# Altium PCB RA-Manager_Relays.PcbDoc
Units mm, origin at the board's own origin, x right, y up, seen from the top; angles counter-clockwise.
Board outline 79.48 x 94.43 mm, 2 copper layers (Top Layer, Bottom Layer), stack 1.571 mm thick; 55 components, 43 nets, 180 pads, 15 vias.
Unrouted connection lines stored in the file: 91.
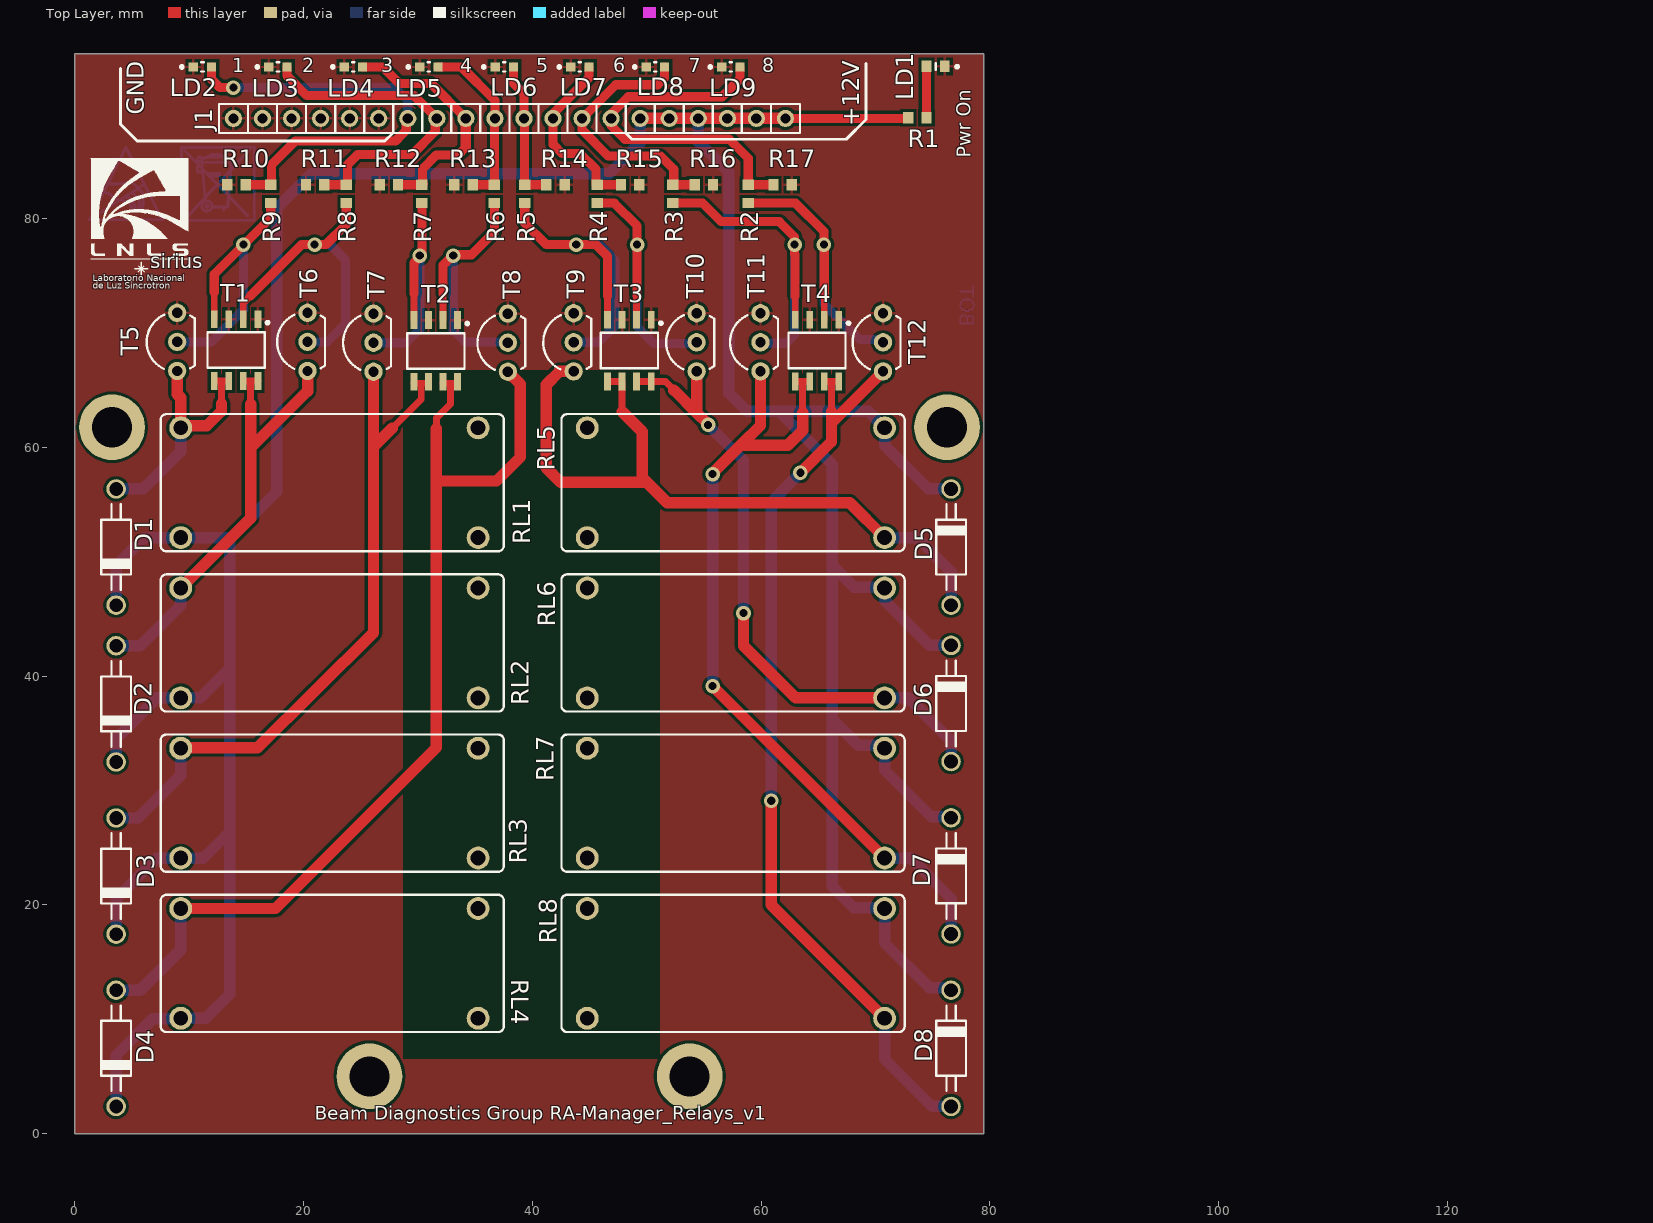
[diagram p0: Top Layer view]
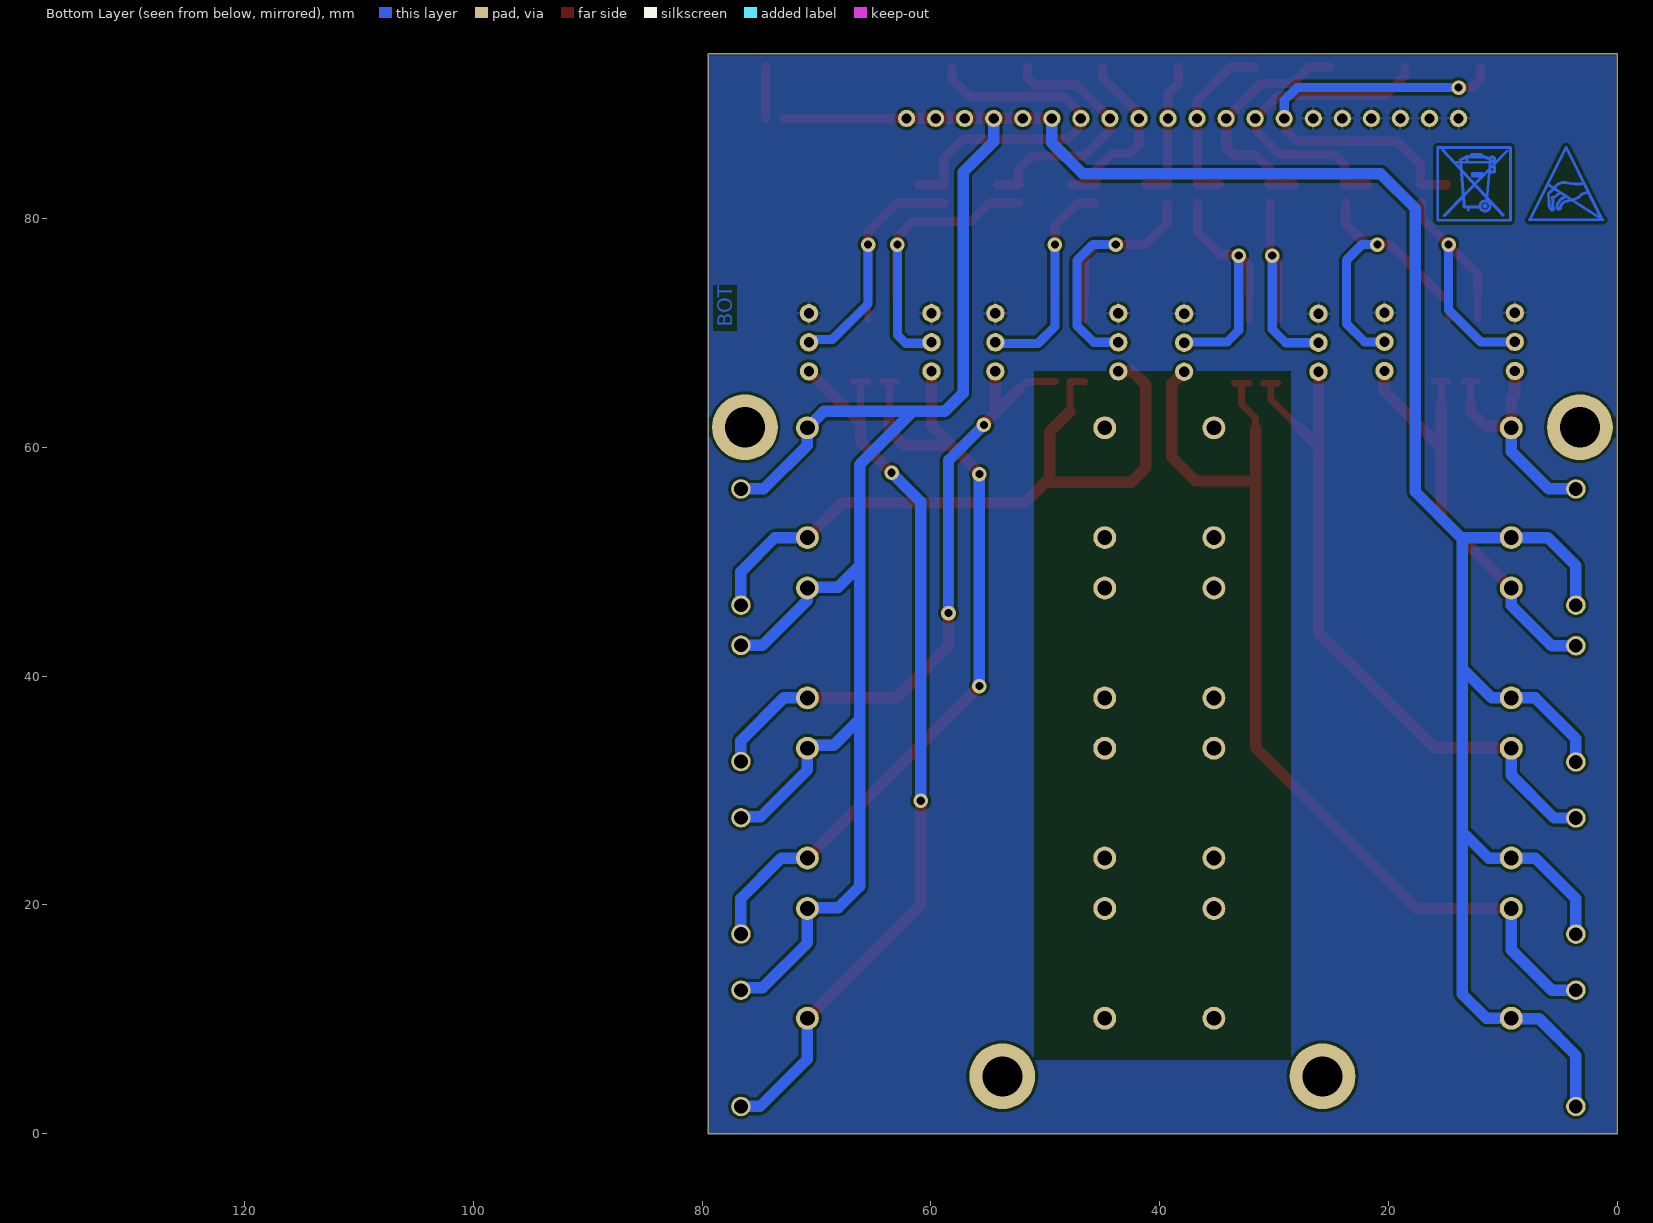
[diagram p1: Bottom Layer view, seen from below]
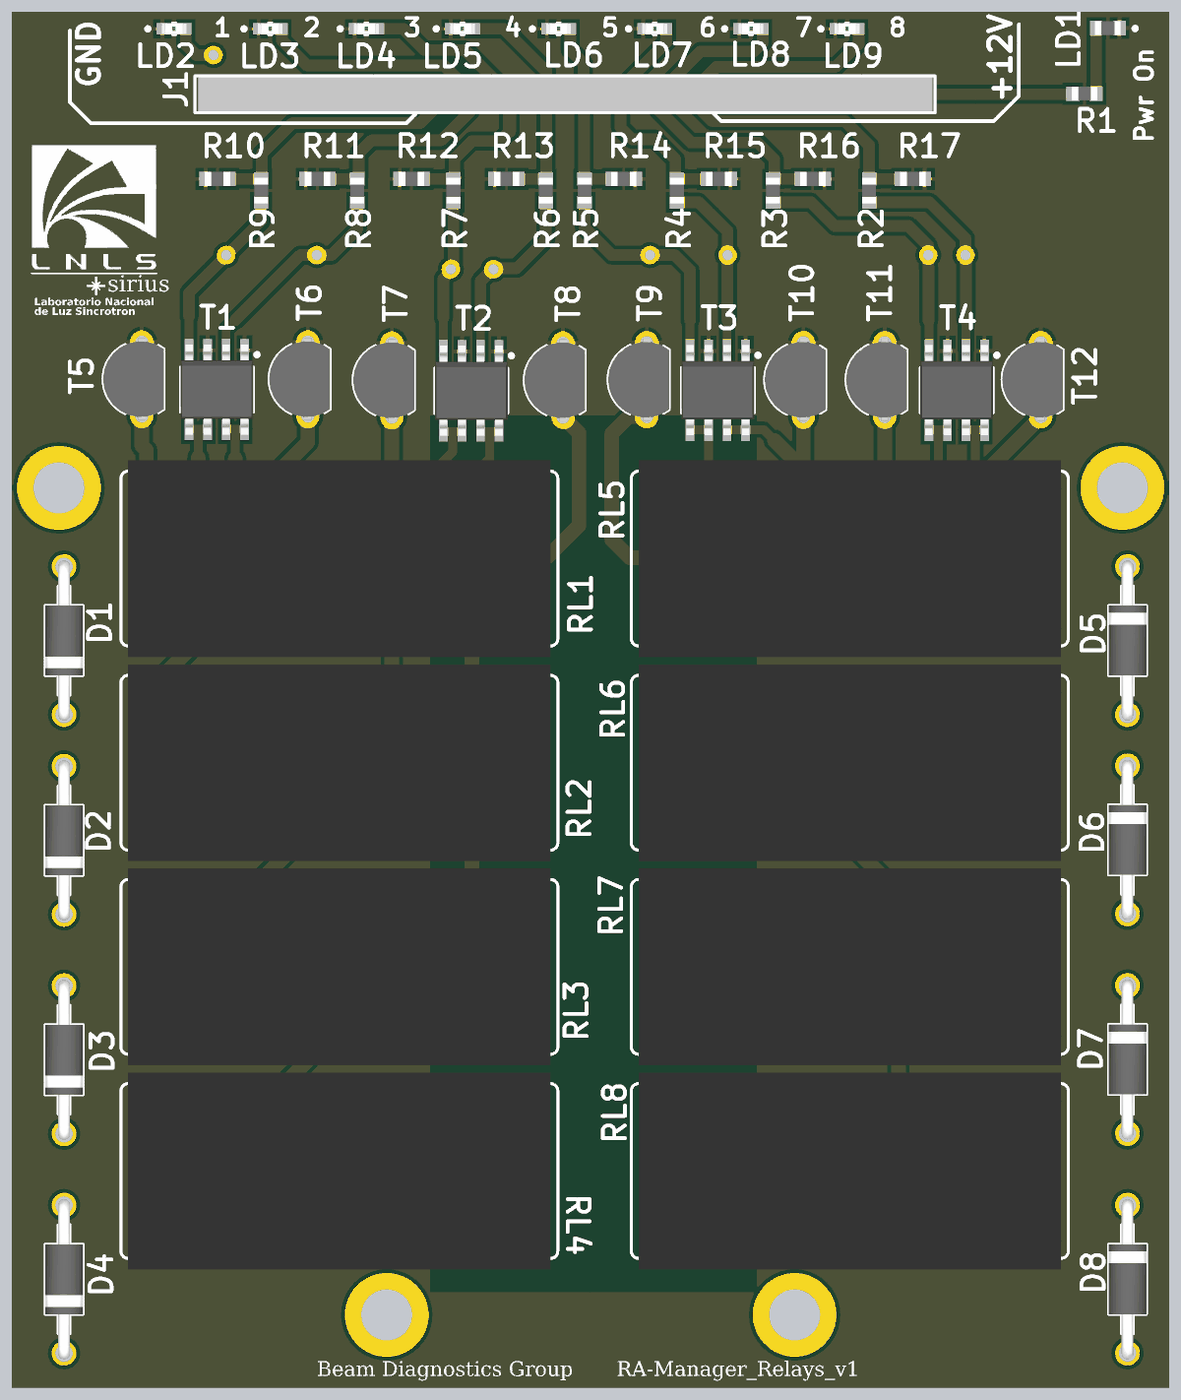
[diagram p2: 3D render of the assembled board from above, using the file's embedded part models]

## Layer stack, top to bottom
Top Solder: solder mask 0.0102, Solder Resist, Dk 3.5
Top Layer: signal copper 0.0356
Dielectric1: core 0.5, FR-4, Dk 4.8
Dielectric2: prepreg 0.5, FR-4, Dk 4.8
Dielectric3: core 0.5, FR-4, Dk 4.8
Bottom Layer: signal copper 0.0356
Bottom Solder: solder mask 0.0102, Solder Resist, Dk 3.5

## Board outline
0,94.425 0,0 79.475,0 79.475,94.425
cut-out: -3.75,23.75
cut-out: -3.75,23.75

## Design rules (kind name [scope] priority, off if disabled: settings)
Clearance Clearance_1 [All] p1: gap=0.254 ignorepadtopadclearanceinfootprint=TRUE
Height [All] p1: minheight=0 maxheight=28 prefheight=12.7
HoleSize [All] p1: absolutevalues=TRUE maxlimit=3.81 minlimit=0.025 maxpercent=80.000 minpercent=20.000
MinimumSolderMaskSliver [All] p1: minsoldermaskwidth=0
PlaneConnect [All] p1: planeconnectstyle=Direct reliefexpansion=0.508 reliefentries=4 reliefconductorwidth=0.254 reliefairgap=0.254
PolygonConnect [All] p1: connectstyle=Relief reliefconductorwidth=0.254 reliefentries=4 polygonreliefangle="90 Angle" airgapwidth=0.254
RoutingVias [All] p1: holewidth=0.711 width=1.27 viastyle="Through Hole" minholewidth=0.711 minwidth=1.27 maxholewidth=0.711 maxwidth=1.27
SilkToSilkClearance [All] p1: silktosilkclearance=0
SilkToSolderMaskClearance [IsPad] p1: minsilkscreentomaskgap=0.1 clearancetoexposedcopper=TRUE
SolderMaskExpansion [All] p1: expansion=0.03
UnRoutedNet [All] p1: checkbadconnections=TRUE
Width [All] p1: maxlimit=1.27 minlimit=0.203 preferedwidth=0.381
23 further rules are at their usual default settings.

## Components (designator, comment, footprint, x,y, rotation, side; value= is the part's Value field where it differs from the comment)
D1 "1N4007" DO-41 3.6,51.275 r90 top
D2 "1N4007" DO-41 3.6,37.567 r90 top
D3 "1N4007" DO-41 3.6,22.508 r90 top
D4 "1N4007" DO-41 3.6,7.45 r90 top
D5 "1N4007" DO-41 76.6,51.275 r270 top
D6 "1N4007" DO-41 76.6,37.6 r270 top
D7 "1N4007" DO-41 76.6,22.525 r270 top
D8 "1N4007" DO-41 76.6,7.45 r270 top
J1 "=Family" TYCO_2-87224-0 13.858,88.75 r0 top locked
LD1 "Green" LED_KINGBRIGHT_APA1606_0605 75.25,93.25 r180 top
LD2 "Orange" LED_OSRAM_LGL29K 11.15,93.25 r0 top
LD3 "Orange" LED_OSRAM_LGL29K 17.75,93.25 r0 top
LD4 "Orange" LED_OSRAM_LGL29K 24.35,93.25 r0 top
LD5 "Orange" LED_OSRAM_LGL29K 30.95,93.25 r0 top
LD6 "Orange" LED_OSRAM_LGL29K 37.55,93.25 r0 top
LD7 "Orange" LED_OSRAM_LGL29K 44.15,93.25 r0 top
LD8 "Orange" LED_OSRAM_LGL29K 50.75,93.25 r0 top
LD9 "Orange" LED_OSRAM_LGL29K 57.35,93.25 r0 top
R1 "360" RESC1608X55N 73.65,88.8 r180 top
R2 "1k" RESC1608X55N 58.868,82.15 r270 top
R3 "1k" RESC1608X55N 52.266,82.15 r270 top
R4 "1k" RESC1608X55N 45.664,82.15 r270 top
R5 "1k" RESC1608X55N 39.325,82.15 r270 top
R6 "1k" RESC1608X55N 36.668,82.15 r270 top
R7 "1k" RESC1608X55N 30.329,82.15 r270 top
R8 "1k" RESC1608X55N 23.727,82.15 r270 top
R9 "1k" RESC1608X55N 17.125,82.15 r270 top
R10 "4k7" RESC1608X55N 14.125,82.95 r180 top
R11 "4k7" RESC1608X55N 21,82.95 r180 top
R12 "4k7" RESC1608X55N 27.45,82.95 r180 top
R13 "4k7" RESC1608X55N 33.975,82.95 r180 top
R14 "4k7" RESC1608X55N 42.018,82.95 r0 top
R15 "4k7" RESC1608X55N 48.543,82.95 r0 top
R16 "4k7" RESC1608X55N 54.993,82.95 r0 top
R17 "4k7" RESC1608X55N 61.868,82.95 r0 top
RL1 "12VDC" REL_YRE_YR-PL2-12 7.5,50.901 r0 top locked
RL2 "12VDC" REL_YRE_YR-PL2-12 7.5,36.892 r0 top locked
RL3 "12VDC" REL_YRE_YR-PL2-12 7.5,22.884 r0 top locked
RL4 "12VDC" REL_YRE_YR-PL2-12 7.5,8.875 r0 top locked
RL5 "12VDC" REL_YRE_YR-PL2-12 72.537,62.901 r180 top locked
RL6 "12VDC" REL_YRE_YR-PL2-12 72.537,48.892 r180 top locked
RL7 "12VDC" REL_YRE_YR-PL2-12 72.537,34.884 r180 top locked
RL8 "12VDC" REL_YRE_YR-PL2-12 72.537,20.875 r180 top locked
T1 "IRF9910Pbf" SOIC127P600X175-8N 14.085,68.494 r270 top
T2 "IRF9910Pbf" SOIC127P600X175-8N 31.55,68.419 r270 top
T3 "IRF9910Pbf" SOIC127P600X175-8N 48.477,68.453 r270 top
T4 "IRF9910Pbf" SOIC127P600X175-8N 64.877,68.453 r270 top
T5 "BC337" TO-92AA-P254 8.935,69.215 r90 top
T6 "BC337" TO-92AA-P254 20.335,69.215 r90 top
T7 "BC337" TO-92AA-P254 26.1,69.14 r90 top
T8 "BC337" TO-92AA-P254 37.85,69.14 r90 top
T9 "BC337" TO-92AA-P254 43.602,69.175 r90 top
T10 "BC337" TO-92AA-P254 54.352,69.175 r90 top
T11 "BC337" TO-92AA-P254 59.935,69.175 r90 top
T12 "BC337" TO-92AA-P254 70.652,69.175 r90 top

## Footprints (in the part's own frame and the unit in brackets; to place one, negate y for a bottom-side part, rotate by r counter-clockwise, add the part's x,y. Pads: shape width x height; smd on the part's side, far side on the other; paste and mask are expansions set on the pad)
DO-41 [mm] "DO-41, Diode, Axial, Body 4.7 x 2.7 mm (LxDia. max), Pin spacing 10.16mm"
  round 1.7 hole 1.2: 1(-5.08,0) 2(5.08,0)
  silkscreen extent -3.74,-1.3 3.74,1.3, body extent -5.48,-1.3 5.48,1.3, height 2.6
LED_KINGBRIGHT_APA1606_0605 [mm] "SMD LED, 2-Leads, Body 1.75x0.95mm, 0605, IPC Medium Density"
  rect 0.85x1 smd: 1(-0.8,-0.05) 2(0.8,-0.05)
  silkscreen extent -2,-0.35 0,0.25, body extent -0.87,-0.52 0.88,0.43, height 0.64
LED_OSRAM_LGL29K [mm] "Green Chip LED, 2-Leads, Body 1.7x0.8mm, IPC Medium Density"
  rect 0.8x0.8 smd: 1(-0.8,0) 2(0.8,0)
  silkscreen extent -1.92,-0.4 0.1,0.4, body extent -0.85,-0.4 0.85,0.4, height 0.67
REL_YRE_YR-PL2-12 [mm]
  round 2 hole 1.3: 1(1.75,1.2) 2(1.75,10.8) 3(27.75,10.8) 4(27.75,1.2)
  silkscreen extent 0,0 30,12, body extent 0.5,-0.75 29.5,12.75, height 25.8
RESC1608X55N [mm] "Chip Resistor, EIA 0603, Metric 1608, Body 1.6x0.8mm, IPC Medium Density"
  rect 0.9x1 smd: 1(-0.8,0) 2(0.8,0)
  body extent -0.87,-0.47 0.88,0.48, height 0.55
SOIC127P600X175-8N [mm] "SOIC 8, Pitch 1.27mm - Body 4x5mm, IPC Medium Density"
  rect 1.55x0.6 smd: 1(-2.7,1.905) 2(-2.7,0.635) 3(-2.7,-0.635) 4(-2.7,-1.905) 5(2.7,-1.905) 6(2.7,-0.635) 7(2.7,0.635) 8(2.7,1.905)
  silkscreen extent -2.52,-2.5 1.55,2.88, body extent -3.1,-2.5 3.1,2.5, height 1.75
TO-92AA-P254 [mm] "TO-92 (TO226), Pitch 2.54mm, Flat Index, 3 In-Line, Bent Leads, Body Dia. 5.3mm"
  round 1.6 hole 0.9: 1(-2.54,0) 2(0,0) 3(2.54,0)
  silkscreen extent -2.36,-1.53 2.37,2.66, body extent -2.81,-1.53 2.81,2.64, height 9.33
TYCO_2-87224-0 [mm] "20 Positions, Pitch 2.54mm, Width 2.54mm, Heigh 13.5mm, SIP Straight Socket"
  round 1.5 hole 0.9: 1(0,0) 2(2.54,0) 3(5.08,0) 4(7.62,0) 5(10.16,0) 6(12.7,0) 7(15.24,0) 8(17.78,0) 9(20.32,0) 10(22.86,0) 11(25.4,0) 12(27.94,0) 13(30.48,0) 14(33.02,0) 15(35.56,0) 16(38.1,0) 17(40.64,0) 18(43.18,0) 19(45.72,0) 20(48.26,0)
  silkscreen extent -1.27,-1.27 49.53,1.27, body extent -1.05,-1.17 49.35,1.17, height 10.37

## Part data
D1 D2 D3 D4 D5 D6 D7 D8: "Diode", Case=DO-41, Manufacturer="FAIRCHILD SEMICONDUCTOR", Power=1A, Voltage=1000V, Author="CERN DEM JLC", Bonding=No, ComponentHeight=2.72mm, ComponentLink1Description="Package Drawing", ComponentLink1URL=\\cern.ch\dfs\Applications\Altium\Datasheets\1N4007_Package.pdf, Component Type=Standard, CreateDate=20/08/2008, Device=1N4007, HelpURL=\\cern.ch\dfs\Applications\Altium\Datasheets\1N4007.pdf, LatestRevisionDate=30/10/2013, Manufacturer Part Number=1N4007, Mounted=Yes, PackageDescription="DO-41, Diode, Axial, Body 4.7 x 2.7mm (LxDia. Max), Pin spacing 10.16mm", Part Description="Axial Lead Standard Recovery Rectifier", Part Number=1N4007, Pin Count=2, PressFit=No, Sense=No, SMD=No, Socket=No
J1: library part TYCO_2-87224-0, "Connector 20 Male", Manufacturer="TYCO ELECTRONICS", Manufacturer Part Number=2-87224-0, Author="LNLS DIG LOS", ComponentHeight=13.5mm, Component Type=Standard, CreateDate=16/11/2017, LatestRevisionDate=16/11/2017, Mounted=Yes, Part Description="20 Contacts, Connector header vertical", Part Number=TYCO_2-87224-0, Pin Count=20, PressFit=No, Sense=No, SMD=No, Socket=No, Status=None
LD1: library part APA1606ZGC, "LED Green 1C 2A", Case=0605, Manufacturer=KINGBRIGHT, Author="LNLS DIG LOS", Bonding=No, Color=Green, ComponentHeight=1.2mm, Component Type=Standard, CreateDate=31/08/2017, LatestRevisionDate=31/08/2017, Manufacturer Part Number=APA1606ZGC, Mounted=Yes, PackageDescription="SMD LED, 2-Leads, Body 1.75x0.95mm, 0605, IPC Medium Density", Part Description="SMD Led Right Angle", Part Number=APA1606ZGC, Pin Count=2, PressFit=No, Sense=No, SMD=Yes, Socket=No
LD2 LD3 LD4 LD5 LD6 LD7 LD8 LD9: library part "LO L29K-J2L1-24-Z", "LED Orange 1C 2A", Case=0603, Manufacturer=OSRAM, Author="LNLS DIG LOS", Bonding=No, Color=Orange, ComponentHeight=0.67mm, Component Type=Standard, CreateDate=31/08/2017, LatestRevisionDate=31/08/2017, Manufacturer Part Number="LO L29K-J2L1-24-Z", Mounted=Yes, PackageDescription="Green Chip LED, 2-Leads, Body 1.7x0.8mm, IPC Medium Density", Part Description="Surface Mount LED (0603 Case)", Part Number="LO L29K-J2L1-24-Z", Pin Count=2, PressFit=No, Sense=No, SMD=Yes, Socket=No
R1: library part R0603_360R_1%_0.1W_100PPM, "Resistor - 1%", Case=0603, Manufacturer=GENERIC, Manufacturer1 ComponentHeight=0.55mm, Manufacturer1 Example="NIC COMPONENT", Manufacturer1 Part Number=NRC06F3600TRF, Power=0.1W, Tolerance=±1%, Author="CERN DEM JLC", Component Type=Standard, CreateDate=03/12/2007, HelpURL=\\cern.ch\dfs\Applications\Altium\Datasheets\R0603_NIC_NRC.pdf, LatestRevisionDate=13/03/2008, Manufacturer Part Number=R0603_360R_1%_0.1W_100PPM, Mounted=Yes, Part Description="General Purpose Thick Film Chip Resistor", Part Number=R0603_360R_1%_0.1W_100PPM, Pin Count=2, Sense=No, SMD=Yes, Socket=No, Status=Preferred, TC=±100ppm/°C
R2 R3 R4 R5 R6 R7 R8 R9: library part R0603_1K_1%_0.1W_100PPM, "Resistor - 1%", Case=0603, Manufacturer=GENERIC, Manufacturer1 ComponentHeight=0.55mm, Manufacturer1 Example="NIC COMPONENT", Manufacturer1 Part Number=NRC06F1001TRF, Power=0.1W, Tolerance=±1%, Author="CERN DEM JLC", Component Type=Standard, CreateDate=03/12/2007, HelpURL=\\cern.ch\dfs\Applications\Altium\Datasheets\R0603_NIC_NRC.pdf, LatestRevisionDate=13/03/2008, Manufacturer Part Number=R0603_1K_1%_0.1W_100PPM, Mounted=Yes, Part Description="General Purpose Thick Film Chip Resistor", Part Number=R0603_1K_1%_0.1W_100PPM, Pin Count=2, Sense=No, SMD=Yes, Socket=No, Status=Preferred, TC=±100ppm/°C
R10 R11 R12 R13 R14 R15 R16 R17: library part R0603_4K7_1%_0.1W_100PPM, "Resistor - 1%", Case=0603, Manufacturer=GENERIC, Manufacturer1 ComponentHeight=0.55mm, Manufacturer1 Example="NIC COMPONENT", Manufacturer1 Part Number=NRC06F4701TRF, Power=0.1W, Tolerance=±1%, Author="CERN DEM JLC", Component Type=Standard, CreateDate=03/12/2007, HelpURL=\\cern.ch\dfs\Applications\Altium\Datasheets\R0603_NIC_NRC.pdf, LatestRevisionDate=13/03/2008, Manufacturer Part Number=R0603_4K7_1%_0.1W_100PPM, Mounted=Yes, Part Description="General Purpose Thick Film Chip Resistor", Part Number=R0603_4K7_1%_0.1W_100PPM, Pin Count=2, Sense=No, SMD=Yes, Socket=No, Status=Preferred, TC=±100ppm/°C
RL1 RL2 RL3 RL4 RL5 RL6 RL7 RL8: library part REL_YRE_YR-PL2-12, Manufacturer=YRE, Manufacturer Part Number=YR-PL2-12, Author="LNLS DIG CAI", ComponentHeight=28mm, ComponentLink1URL=https://proesi.com.br/rele-para-refrigerac-o-yr-pl2-12-12v-16a-250vac.html, Component Type=Standard, CreateDate=06/02/2020, LatestRevisionDate=06/02/2020, Mounted=Yes, PackageDescription="4 Leads, Row Spacing  9,6 mm; Body 30mm x 12mm  YR Serie", Part Description="16A SPDT Power PCB Relay YR Series", Part Number=REL_YRE_YR-PL2-12, Pin Count=4, PressFit=No, Sense=No, SMD=No, Socket=No, Status=None
T1 T2 T3 T4: "Dual SO-8 MOSFET For POL Cconverter", Case=DO8, Manufacturer="INTERNATIONAL RECTIFIER", Author="CERN DEM JLC", Bonding=No, ComponentHeight=1.75mm, Component Type=Standard, CreateDate=30/08/2010, Device=IRF9910Pbf, HelpURL=\\cern.ch\dfs\Applications\Altium\Datasheets\IRF9910Pbf.pdf, LatestRevisionDate=30/08/2010, Manufacturer Part Number=IRF9910Pbf, Mounted=Yes, PackageDescription="SOIC 8, Pitch 1.27mm - Body 4x5mm, IPC Medium Density", Part Description="20V 10A(Q1) 20V 12A (Q2) Dual SO-8 MOSFET For POL Cconverter", Part Number=IRF9910Pbf, Pin Count=8, PressFit=No, Sense=No, SMD=Yes, Socket=No
T5 T6 T7 T8 T9 T10 T11 T12: "NPN Transistor", Case=TO-92, Manufacturer="FAIRCHILD SEMICONDUCTOR", Author="CERN DEM JLC", Bonding=No, ComponentHeight=7.7mm, Component Type=Standard, CreateDate=18/11/2008, Device=BC337, HelpURL=\\cern.ch\dfs\Applications\Altium\Datasheets\BC337.pdf, LatestRevisionDate=27/08/2014, Manufacturer Part Number=BC337, Mounted=Yes, PackageDescription="TO-92 (TO226), Pitch 2.54mm, Flat Index, 3 In-Line, Bent Leads, Body Dia. 5.3mm", Part Description="45V 800mA NPN Small Signal Transistor", Part Number=BC337, Pin Count=3, PressFit=No, Sense=No, SMD=No, Socket=No, Status=Obsolete

## Free pads (board coordinates)
  round 5.75 hole 3.5: 47(3.25,61.75) 47(25.75,5) 47(53.75,5) 47(76.25,61.75)

## Via types
v1: diameter 1.27, hole 0.711, Top Layer to Bottom Layer, 15 vias

## Nets (pads, with @x,y where several pads share a name; then routed paths per layer and width w, separated by ;. In a path a pad name is that pad's centre, name@x,y a point inside that pad or via, vN(x,y) a via of type N, cw(c..) or ccw(c..) an arc to the next point about the centre after c; other vN are vias at no path point)
12Vin: D1.1 D2.1 D3.1 D4.1 D5.1 D6.1 D7.1 D8.1 J1.15 J1.16 J1.17 J1.18 J1.19 J1.20 R1.2 RL1.1 RL2.1 RL3.1 RL4.1 RL5.1 RL6.1 RL7.1 RL8.1 | length 327.5
  Top Layer w0.8: J1.20@62.127,88.756 R1.2@72.85,88.756
  Top Layer w1: J1.15@49.427,88.756 J1.20@62.127,88.756
  Bottom Layer w1: D4.1 3.6,6.825 6.813,10.038 9.213,10.038 RL4.1 11.425,10.075 13.55,12.2 13.55,25.975 13.55,40.675 ; D3.1 3.6,20.525 7.159,24.084 RL3.1 11.234,24.084 13.125,25.975 ; D2.1 3.6,34.525 7.167,38.092 RL2.1 10.967,38.092 13.55,40.675 ; D1.1 3.6,49.65 6.051,52.101 RL1.1 13.575,52.101 ; J1.15 49.418,86.618 46.7,83.9 20.65,83.9 17.625,80.875 17.625,56.1 13.55,52.025 13.55,40.675 ; J1.17 54.498,86.722 57.175,84.046 57.175,64.725 58.77,63.13 61.57,63.13 ; 66.225,36.221 68.491,33.955 70.516,33.955 RL7.1 70.787,31.784 74.886,27.685 76.52,27.685 D7.1 ; 66.225,49.375 66.225,21.6 68.07,19.755 70.707,19.755 RL8.1 70.787,16.663 74.706,12.744 76.386,12.744 D8.1 ; D6.1 74.741,42.68 70.787,46.634 RL6.1 70.707,47.772 68.098,47.772 66.225,49.646 66.225,58.475 61.57,63.13 ; D5.1 74.616,56.355 70.787,60.184 RL5.1 69.358,63.13 61.57,63.13
"Controller Out 1": R9.2 T1.4 T5.2 | length 24.9
  Top Layer w0.6: T1.4 12.18,73.549
  Top Layer w0.8: 12.18,73.549 12.18,75.13 17.125,80.075 R9.2
  Bottom Layer w0.8: T5.2 11.94,69.215 14.725,72 v1(14.725,77.725)
"Controller Out 2": R8.2 T1.2 T6.2 | length 27.9
  Top Layer w0.6: T1.2 14.72,72.62 15.35,73.25
  Top Layer w0.8: 15.35,73.25 19.825,77.725 21.95,77.725 23.725,79.5 23.725,81.348 R8.2
  Bottom Layer w0.8: T6.2 22.065,69.215 23.65,70.8 23.65,76.375 22.3,77.725 v1(20.95,77.725)
"Controller Out 3": R7.2 T2.4 T7.2 | length 21.5
  Top Layer w0.6: T2.4 29.645,73.425
  Top Layer w0.8: 29.645,73.425 29.645,76.122 30.329,76.805 R7.2
  Bottom Layer w0.8: T7.2 28.965,69.14 30.15,70.325 v1(30.15,76.753)
"Controller Out 4": R6.2 T2.2 T8.2 | length 24.7
  Top Layer w0.6: T2.2 32.185,73.45
  Top Layer w0.8: 32.185,73.45 32.185,75.938 33.072,76.825 34.675,76.825 36.668,78.818 R6.2
  Bottom Layer w0.8: v1(33.08,76.753) 33.08,70.22 34.085,69.215 T8.2@37.775,69.215
"Controller Out 5": R5.2 T3.4 T9.2 | length 29.6
  Top Layer w0.6: T3.4 46.572,73.25
  Top Layer w0.8: R5.2 39.325,79.6 41.2,77.725 v1(43.825,77.725) 45.525,77.725 46.572,76.678 46.572,73.25
  Bottom Layer w0.8: T9.2 45.75,69.175 47.225,70.65 47.225,76.325 45.825,77.725 v1(43.825,77.725)
"Controller Out 6": R4.2 T3.2 T10.2 | length 25.3
  Top Layer w0.6: T3.2 49.112,73.25
  Top Layer w0.8: R4.2 47.155,81.35 49.15,79.355 49.15,77.55 49.131,77.531 49.131,73.25
  Bottom Layer w0.8: v1@49.15,77.55 49.15,70.55 50.625,69.075 54.002,69.075 T10.2@54.227,69.3
  other v1: 49.15,77.725
"Controller Out 7": R3.2 T4.4 T11.2 | length 30.4
  Top Layer w0.6: 62.948,73.223 62.972,73.2 T4.4
  Top Layer w0.8: R3.2 54.875,81.35 56.5,79.725 61.575,79.725 62.925,78.375 v1(62.925,77.725) 62.925,76.875 62.948,76.852 62.948,73.223
  Bottom Layer w0.8: T11.2 60.01,69.1 62.2,69.1 62.925,69.825 v1(62.925,77.725)
"Controller Out 8": R2.2 T4.2 T12.2 | length 27.5
  Top Layer w0.6: T4.2 65.512,73.225
  Top Layer w0.8: R2.2 63,81.35 65.475,78.875 v1(65.475,77.725) 65.512,77.688 65.512,73.225
  Bottom Layer w0.8: v1(65.475,77.725) 65.475,75.978 65.475,72.55 68.608,69.417 70.894,69.417 T12.2@71.095,69.215
GND: J1.1 J1.2 J1.3 J1.4 J1.5 J1.6 LD1.1 LD2.1 LD3.1 LD4.1 LD5.1 LD6.1 LD7.1 LD8.1 LD9.1 R10.2 R11.2 R12.2 R13.2 R14.2 R15.2 R16.2 R17.2 T1.1 T1.3 T2.1 T2.3 T3.1 T3.3 T4.1 T4.3 T5.3 T6.3 T7.3 T8.3 T9.3 T10.3 T11.3 T12.3
NetLD1_2: LD1.2 R1.1 | length 4.5
  Top Layer w0.8: R1.1 LD1.2
NetRL1_3: RL1.3
NetRL1_4: RL1.4
NetRL2_3: RL2.3
NetRL2_4: RL2.4
NetRL3_3: RL3.3
NetRL3_4: RL3.4
NetRL4_3: RL4.3
NetRL4_4: RL4.4
NetRL5_3: RL5.3
NetRL5_4: RL5.4
NetRL6_3: RL6.3
NetRL6_4: RL6.4
NetRL7_3: RL7.3
NetRL7_4: RL7.4
NetRL8_3: RL8.3
NetRL8_4: RL8.4
PD1: J1.7 LD2.2 R9.1 R10.1 | length 38.9
  Top Layer w0.8: LD2.2 11.95,92.175 12.675,91.45 v1(13.858,91.45) ; R10.1 R9.1 17.15,82.95 17.175,82.975 17.175,84.675 19.275,86.775 28.025,86.775 28.6,87.35 28.964,87.714 28.964,88.616 J1.7 J1.7@28.909,88.75
  Bottom Layer w0.8: v1(13.858,91.45) 27.975,91.45 29.098,90.327 J1.7
PD2: J1.8 LD3.2 R8.1 R11.1 | length 29.2
  Top Layer w0.8: LD3.2 18.55,92.475 20.279,90.746 29.642,90.746 J1.8 31.504,88.616 31.504,87.629 29.475,85.6 24.725,85.6 23.827,84.702 23.827,82.975 23.802,82.95 R8.1 R11.1
PD3: J1.9 LD4.2 R7.1 R12.1 | length 21.5
  Top Layer w0.8: LD4.2 26.9,93.25 28.35,91.8 31.128,91.8 J1.9 ; R12.1 R7.1 ; R7.1@30.4,83.021 30.4,84.35 31.6,85.55 33.5,85.55 34.178,86.228
  Top Layer w0.9: R7.1 30.354,82.95 30.379,82.975 30.379,83 R7.1@30.4,83.021 ; 34.178,86.228 J1.9
PD4: J1.10 LD5.2 R6.1 R13.1 | length 15.5
  Top Layer w0.8: LD5.2 33.8,93.25 36.718,90.332 J1.10 36.693,88.725 36.693,82.975 R6.1 R13.1
PD5: J1.11 LD6.2 R5.1 R14.1 | length 12.6
  Top Layer w0.8: LD6.2 38.35,91.8 39.258,90.892 J1.11 39.292,88.717 39.292,82.975 39.317,82.95 R5.1 R14.1
PD6: J1.12 LD7.2 R4.1 R15.1 | length 16.3
  Top Layer w0.8: LD7.2 44.95,92.325 41.798,89.173 J1.12 41.798,86.477 42.6,85.675 44.175,85.675 45.564,84.286 45.564,82.975 45.589,82.95 R4.1 R15.1
PD7: J1.13 LD8.2 R3.1 R16.1 | length 23.4
  Top Layer w0.8: LD8.2 51.55,92.3 50.95,91.7 47.288,91.7 J1.13 44.338,87.737 46.625,85.45 51.2,85.45 52.35,84.3 52.35,82.975 R3.1@52.325,82.95 ; R3.1 R3.1@52.325,82.95 ; R16.1 R3.1@52.325,82.95
PD8: J1.14 LD9.2 R2.1 R17.1 | length 32.3
  Top Layer w0.8: LD9.2 58.15,92.225 56.571,90.646 48.371,90.646 46.878,89.153 J1.14 46.878,88.122 48.075,86.925 57.2,86.925 58.868,85.257 R2.1 R17.1
"RL1 Out": D1.2 RL1.2 T1.5 T1.6 T5.1 | length 22.3
  Top Layer w0.6: T1.5 12.815,65.794 ; 12.815,63.825 12.815,65.794 ; T1.6 12.815,65.794
  Top Layer w1: T5.1 8.935,64.64 9.25,64.325 RL1.2 9.441,61.892 11.542,61.892 12.815,63.165 12.815,63.825
  Bottom Layer w1: D1.2 5.98,56.355 9.25,59.625 RL1.2
"RL2 Out": D2.2 RL2.2 T1.7 T1.8 T6.1 | length 39.3
  Top Layer w0.6: T1.7 15.355,65.794 ; 15.355,63.75 15.355,65.794 ; T1.8 15.355,65.794
  Top Layer w1: RL2.2 15.355,53.797 15.355,63.75 ; 15.355,59.93 20.335,64.91 T6.1
  Bottom Layer w1: D2.2 5.722,42.647 9.25,46.175 RL2.2
"RL3 Out": D3.2 RL3.2 T2.5 T2.6 T7.1 | length 62
  Top Layer w0.6: 27.75,61.675 30.28,64.205 30.28,65.6 ; T2.5@29.645,65.6 30.28,65.6 ; T2.6@30.915,65.6 30.28,65.6
  Top Layer w1: RL3.2@9.25,33.794 9.2,33.734 15.959,33.734 26.1,43.775 T7.1 ; 26.113,60.038 27.75,61.675
  Bottom Layer w1: D3.2 5.513,27.588 9.25,31.325 RL3.2
"RL4 Out": D4.2 RL4.2 T2.7 T2.8 T8.1 | length 88.8
  Top Layer w0.6: 31.6,61.6 31.6,62.55 32.82,63.77 32.82,65.6 ; T2.7@32.185,65.6 32.82,65.6 ; T2.8@33.455,65.6 32.82,65.6
  Top Layer w1: RL4.2@9.25,19.919 RL4.2 17.525,19.675 31.6,33.75 31.6,61.6 ; 31.65,57.05 36.85,57.05 38.95,59.15 38.95,65.5 T8.1
  Bottom Layer w1: D4.2 5.705,12.53 9.25,16.075 RL4.2
"RL5 Out": D5.2 RL5.2 T3.5 T3.6 T9.1 | length 65.8
  Top Layer w0.6: T3.5@46.572,65.697 T3.5 T3.6 47.842,63.108
  Top Layer w1: T9.1 42.36,66.635 41.2,65.475 41.2,58.2 42.45,56.95 49.975,56.95 51.775,55.15 ; 47.842,63.108 49.6,61.35 49.6,57.325 51.775,55.15 ; RL5.2 67.738,55.15 51.775,55.15
  Bottom Layer w1: RL5.2 73.624,52.101 76.6,49.125 D5.2
"RL6 Out": D6.2 RL6.2 T3.7 T3.8 T10.1 | length 55.5
  Top Layer w0.6: T3.7 T3.8 51.62,65.753 52.371,65.002
  Top Layer w1: 52.371,65.002 54.352,63.021 ; T10.1 54.352,63.021 ; v1(55.35,61.95) 55.35,62.023 54.352,63.021 ; v1(58.45,45.5) 58.45,42.65 63.008,38.092 RL6.2
  Bottom Layer w1: v1(55.35,61.95) 58.45,58.85 v1(58.45,45.5) ; RL6.2 72.858,38.092 76.6,34.35 D6.2
"RL7 Out": D7.2 RL7.2 T4.5 T4.6 T11.1 | length 72.4
  Top Layer w0.6: T4.5 63.607,65.753 ; 63.625,63.025 63.625,65.735 63.607,65.753 ; T4.6 63.607,65.753
  Top Layer w1: v1(55.746,39.125) RL7.2 ; v1(55.746,57.654) 55.746,57.721 58.2,60.175 ; T11.1 59.935,61.91 58.2,60.175 ; 63.625,63.025 63.625,61.475 62.325,60.175 58.2,60.175
  Bottom Layer w1: v1(55.746,39.125) v1(55.746,57.654) ; RL7.2 73.066,24.084 76.6,20.55 D7.2
"RL8 Out": D8.2 RL8.2 T4.7 T4.8 T12.1 | length 80.7
  Top Layer w0.6: T4.7 66.147,65.753 ; 66.147,63.125 66.147,65.753 ; T4.8 66.147,65.753
  Top Layer w1: v1(60.875,29.1) 60.875,19.987 RL8.2 ; v1(63.425,57.775) 66.147,60.497 66.147,62.13 ; 66.147,63.125 66.147,62.13 ; T12.1 66.147,62.13
  Bottom Layer w1: v1(60.875,29.1) 60.875,55.225 v1(63.425,57.775) ; RL8.2 70.787,6.513 74.93,2.37 D8.2
copper on no net: | length 137
  Bottom Layer w0.25: 9.612,85.905 15.111,80.244 ; 9.947,80.287 15.238,85.994 ; 11.093,84.93 10.755,84.922 14.204,84.922 ; 11.093,84.963 11.093,84.976 11.39,81.625 ; 12.02,80.996 13.371,80.996 13.371,81.311 13.694,85.108 ; 13.008,80.739 13.008,80.866 ; 13.135,85.057 13.135,85.438 ; 15.675,79.85 9.325,79.85 9.325,86.2 15.675,86.2 ; 1.321,79.892 4.445,86.216 ; 1.321,79.892 7.62,79.892 1.321,79.892 ; 3.124,83.041 ccw(c3.307,83.669) 3.276,83.016 ; 3.124,83.041 ccw(c2.946,82.432) 2.946,83.067 cw(c2.946,82.432) 3.124,83.041 ; 3.124,83.041 ccw(c3.307,83.669) 3.276,83.016 ; 3.225,81.975 ccw(c3.818,82.485) 3.403,81.822 ; 3.225,81.975 ccw(c3.818,82.485) 3.403,81.822 ; 3.226,81.975 ccw(c2.616,81.449) 2.616,82.254 cw(c2.616,81.449) 3.226,81.975 ; 3.276,83.016 ccw(c3.467,87.096) 3.657,83.016 ; 3.276,83.016 ccw(c3.467,87.096) 3.657,83.016 ; 3.403,81.822 4.318,81.517 ; 3.403,81.822 4.318,81.517 ; 3.657,83.016 ccw(c3.523,85.891) 4.292,83.118 ; 3.657,83.016 ccw(c3.523,85.891) 4.292,83.118 ; 4.292,83.118 cw(c4.589,82.048) 5.283,82.914 ; 4.292,83.118 cw(c4.589,82.048) 5.283,82.914 ; 4.318,81.517 cw(c4.318,80.882) 4.953,80.908 ; 4.318,81.517 cw(c4.318,80.882) 4.953,80.908 ; 4.445,86.216 7.645,79.892 4.445,86.216 ; 4.953,80.908 ccw(c5.098,80.963) 5.181,80.832 ; 4.953,80.908 ccw(c5.098,80.963) 5.181,80.832 ; 5.003,81.568 ccw(c4.379,81.103) 4.496,81.873 cw(c4.379,81.103) 5.003,81.568 ; 5.004,81.568 cw(c0.746,78.399) 5.181,81.314 ; 5.004,81.568 cw(c0.746,78.399) 5.181,81.314 ; 5.181,80.832 5.207,80.882 ; 5.181,80.832 5.207,80.882 ; 5.181,81.314 cw(c4.818,81.076) 5.207,80.882 ; 5.181,81.314 cw(c4.818,81.076) 5.207,80.882 ; 5.283,82.914 cw(c5.032,82.601) 5.41,82.737 ; 5.283,82.914 cw(c5.032,82.601) 5.41,82.737 ; 5.41,81.924 cw(c9.359,87.708) 5.029,82.203 ccw(c9.359,87.708) 5.41,81.924 ; 5.41,81.924 ccw(c5.59,82.189) 5.537,81.873 ; 5.41,81.924 ccw(c5.59,82.189) 5.537,81.873 ; 5.41,82.737 ccw(c5.755,82.859) 5.588,82.533 ; 5.41,82.737 ccw(c5.755,82.859) 5.588,82.533 ; 5.537,81.873 5.689,81.848 ; 5.537,81.873 5.689,81.848 ; 5.562,80.933 ccw(c5.677,80.874) 5.766,80.781 ; 5.562,80.933 ccw(c5.677,80.874) 5.766,80.781 ; 5.562,80.933 5.639,81.086 ; 5.562,80.933 5.639,81.086 ; 5.588,82.533 5.715,82.432 ; 5.588,82.533 5.715,82.432 ; 5.613,81.644 ccw(c2.159,83.056) 5.689,81.848 ; 5.613,81.644 ccw(c2.159,83.056) 5.689,81.848 ; 5.613,81.644 ccw(c5.972,81.496) 5.588,81.441 cw(c5.972,81.496) 5.613,81.644 ; 5.639,81.086 5.588,81.441 5.639,81.086 ; 5.715,82.432 5.867,82.305 ; 5.715,82.432 5.867,82.305 ; 5.766,80.781 ccw(c5.33,81.213) 5.943,81.213 ; 5.766,80.781 ccw(c5.33,81.213) 5.943,81.213 ; 5.867,82.305 cw(c5.59,81.973) 6.02,82.025 ; 5.867,82.305 cw(c5.59,81.973) 6.02,82.025 ; 5.943,81.213 5.943,81.543 ; 5.943,81.213 5.943,81.543 ; 5.943,81.543 5.969,81.746 ; 5.943,81.543 5.969,81.746 ; 5.969,81.746 5.994,81.898 ; 5.969,81.746 5.994,81.898 ; 5.994,81.898 6.02,82 ; 5.994,81.898 6.02,82 ; 6.02,82 6.02,82.025 ; 6.02,82 6.02,82.025 ; 1.244,79.892 6.07,82.991 1.244,79.892 ; 10.722,84.074 10.722,84.557 11.136,84.557 11.167,84.074 10.722,84.074 ; 11.103,85.184 ccw(c10.913,85.184) 11.103,85.184 ; 11.149,85.192 cw(c11.781,84.46) 11.84,85.425 11.149,85.192 ; 11.634,81.092 ccw(c11.535,81.092) 11.634,81.092 ; 11.776,83.69 11.776,83.927 12.655,83.927 12.655,83.69 11.776,83.69 ; 11.855,85.352 11.855,85.595 12.734,85.595 12.734,85.352 11.855,85.352 ; 11.982,81.092 ccw(c11.535,81.092) 11.982,81.092 ; 12.757,85.438 cw(c12.711,83.693) 13.694,85.136 12.757,85.438
  Bottom Layer w0.254: 15.675,79.85 15.675,86.2

## Polygon pours and split planes (outlines as drawn)
GND on Top Layer "Top Layer-GND" (solid, remove dead copper, pour order 0): 79.475,94.475 0,94.425 0,0 79.475,0
GND on Bottom Layer "Bottom Layer-GND" (solid, remove dead copper, pour order 2): 79.375,94.25 0.125,94.25 0.125,0 79.375,0

## Other copper
Top Layer:
  pour cut-out: 28.725,66.725 51.15,66.725 51.15,6.55 28.725,6.55
  region: 134.825,-3.35
Bottom Layer:
  pour cut-out: 28.55,66.626 50.975,66.626 50.975,6.451 28.55,6.451
  text "BOT" at 77.35,70.55 h1.27 r270

## Silkscreen, mask and mechanical layers (free items; w line width, h text height)
Top Overlay:
  drawing of 22 lines, arcs and shapes, not listed
  text "1" at 13.75,92.775 h1.2
  text "2" at 19.875,92.775 h1.2
  text "3" at 26.775,92.775 h1.2
  text "4" at 33.675,92.775 h1.2
  text "5" at 40.35,92.775 h1.2
  text "6" at 47.05,92.775 h1.2
  text "7" at 53.65,92.775 h1.2
  text "8" at 60.075,92.775 h1.2
  text "GND" at 6,89.05 h1.5 r90
  text "+12V" at 68.575,88.05 h1.5 r90
  text "Pwr On" at 78.3,85.3 h1.2 r90
  text "sirius" at 6.575,75.227 h2.2
  text "Laboratorio Nacional" at 1.55,74.275 h1
  text "de Luz Sincrotron" at 1.55,73.625 h1
  text "Beam Diagnostics Group" at 20.95,0.8 h2
  text "RA-Manager_Relays_v1" at 41.525,0.8 h2
Mechanical 13:
  lines w0.1: -0.025,0 -0.025,94.475 0.225,94.475 0.225,94.475 79.475,94.475 79.475,0 0,0